# EAGLE board FM-VHF-Oscillator (EAGLE 7.6.0)
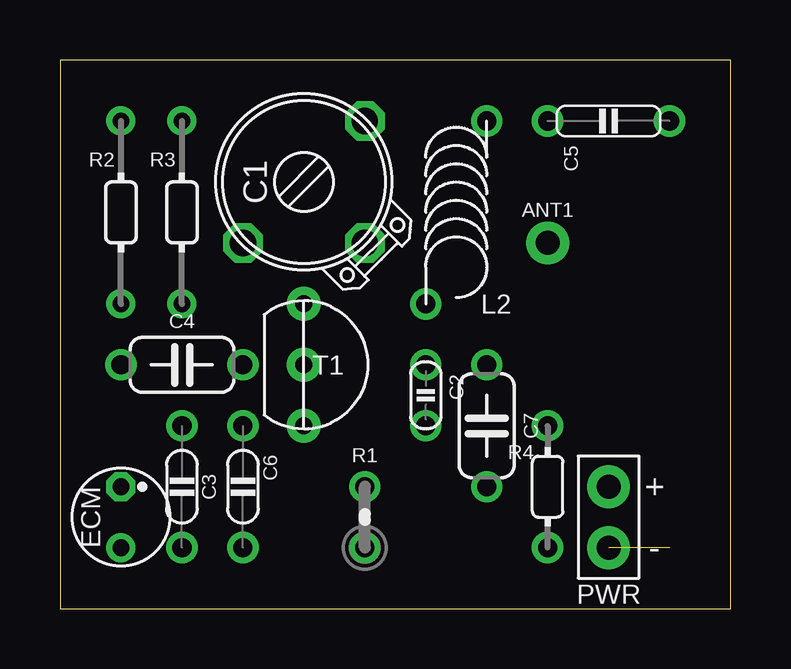
[diagram p0: board, top side]
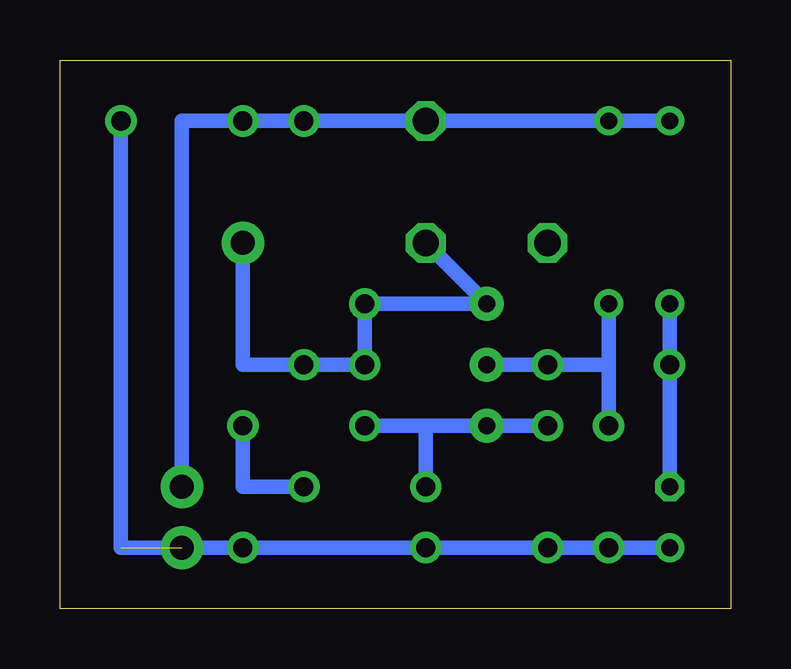
[diagram p1: board, bottom side, seen from below]

Size 27.94 x 22.86 mm. Coordinates in mm from the lower left corner, seen from the top.
Outline: 0,0 27.94,0 27.94,22.86 0,22.86 0,0
Copper layers (1*16): Top 0.035mm / dielectric 1.5mm / Bottom 0.035mm
Design rules "default": minimum track width 10mil, minimum drill 24mil, track to track 8mil, track to pad 8mil, pad to pad 8mil, via to via 8mil, smd to smd 8mil, copper to edge 40mil, drill to drill 8mil, minimum pad ring 10mil, minimum via ring 8mil, stop-mask expansion 4mil, vias tented up to drill 0mil, thermal gap 10mil
Net classes: 0 default: width 0.61 mm

## Footprints (pad centres in the part's own frame; a part is rotated, then mirrored left to right if it is on the bottom)
SPAD = drill 1 pad 1.778: 1 0,0
TRIM-2222-808 = drill 1.1 octagon: 1 -2.54,2.54; 2 -2.54,-2.54; 3 2.54,-2.54
C025-015X024 = drill 0.8: 1 -1.27,0; 2 1.27,0
C050-020X036/V = drill 0.8: 1 0,-2.54; 2 0,2.54
C050-024X044 = drill 0.8: 1 -2.54,0; 2 2.54,0
C050-020X044/V = drill 0.8: 1 0,2.54; 2 0,-2.54
C050-020X036 = drill 0.8: 1 -2.54,0; 2 2.54,0
ECM-4 = drill 0.7 pad 1.2 octagon: 1 0,1.27 | drill 0.7 pad 1.2: 2 0,-1.27
L-04/7V-X = drill 0.8: 1 -1.27,-3.81; 2 1.27,3.81
0204/2V = drill 0.8: 1 0,1.27; 2 0,-1.27
0202/7-V = drill 0.7: 1 0,3.81; 2 0,-3.81
0202/5-V = drill 0.8: 1 0,2.54; 2 0,-2.54
PWR-R = drill 1 pad 1.778: 1 0,-1.27; 2 0,1.27
TO92-CBE = drill 0.7 pad 1.422: B 0,0; C 0,2.54; E 0,-2.54

## Placement (x,y rotation side)
ANT1  ANT  [SPAD]  20.32,15.24 270 top
C1  2.5 - 30pF  [TRIM-2222-808]  10.16,17.78 90 top
C2  22pF  [C025-015X024]  15.24,8.89 270 top
C3  1nF  [C050-020X036/V]  5.08,5.08 180 top
C4  330nF  [C050-024X044]  5.08,10.16 0 top
C5  22nF  [C050-020X044/V]  22.86,20.32 90 top
C6  1nF  [C050-020X036]  7.62,5.08 270 top
C7  1nF  [C050-024X044]  17.78,7.62 270 top
ECM  ECM-4  [ECM-4]  2.54,3.81 0 top
L2  1uH  [L-04/7V-X]  16.51,16.51 0 top
R1  470  [0204/2V]  12.7,3.81 0 top
R2  4.7k  [0202/7-V]  2.54,16.51 0 top
R3  47k  [0202/7-V]  5.08,16.51 0 top
R4  330k  [0202/5-V]  20.32,5.08 0 top
S2  VCC_GNDPWR-R  [PWR-R]  22.86,3.81 0 top
T1  BC547  [TO92-CBE]  10.16,10.16 0 top

## Library data of the parts
ANT1 S2 = pad
C1 = cap-trim
C2-C7 = c
ECM = ECM
L2 = l
R1-R4 = r
T1 = t

## Nets
GND: C3.2 C5.2 C6.2 ECM.2 R1.2 R4.2 S2.1
N$1: C7.2 R4.1
N$2: ANT1.1 C1.2 C2.1 C7.1 L2.1 T1.C
N$3: C2.2 C6.1 R1.1 T1.E
N$5: C3.1 C4.2 R3.2 T1.B
N$6: C4.1 ECM.1 R2.2
VCC: C1.3 C5.1 L2.2 R2.1 R3.1 S2.2

## Tracks (layer width: path | path; a pad name or v marks a point on that pad's centre or on a via)
GND  (1 unrouted)
  Bottom 0.61: ECM.2 C3.2 R1.2 C6.2 R4.2 25.4,2.54 C5.2
N$1
  Bottom 0.61: C7.2 20.32,5.08 R4.1
N$2
  Bottom 0.61: C1.2 T1.C L2.1 C2.1 | C2.1 20.32,10.16 ANT1.1 | C7.1 C2.1
N$3
  Bottom 0.61: R1.1 12.7,7.62 C2.2 C6.1 T1.E
N$5
  Bottom 0.61: 5.08,10.16 R3.2 | 5.08,10.16 C4.2 T1.B | 5.08,10.16 C3.1
N$6
  Bottom 0.61: ECM.1 C4.1 R2.2
VCC
  Bottom 0.61: R2.1 R3.1 C1.3 L2.2 C5.1 22.86,20.32 S2.2